# Altium PCB develer_2L_A4.PcbDoc
Units mm, origin at the board's own origin, x right, y up, seen from the top; angles counter-clockwise.
Board outline 200 x 100 mm, 2 copper layers (Top Layer, Bottom Layer), stack 1.57 mm thick; 3 components, 0 nets, 1 pads, 1 vias.
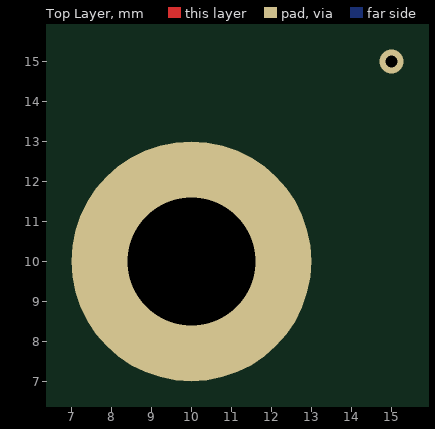
[diagram p0: Top Layer view]
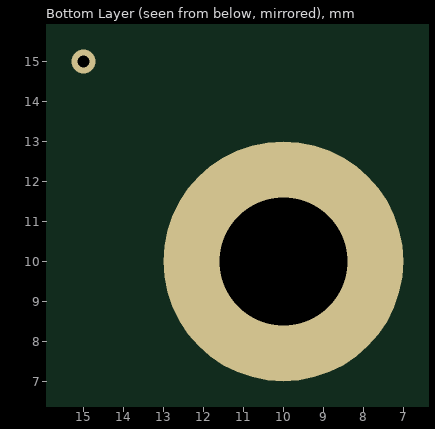
[diagram p1: Bottom Layer view, seen from below]

## Layer stack, top to bottom
Top Solder: solder mask 0.01, Solder Resist, Dk 3.5
Top Layer: signal copper 0.035
Dielectric1: core 1.5, FR-4, Dk 4.2
Bottom Layer: signal copper 0.035
Bottom Solder: solder mask 0.01, Solder Resist, Dk 3.5

## Board outline
0,0 0,100 200,100 200,0

## Design rules (kind name [scope] priority, off if disabled: settings)
Clearance [All] p1: gap=0.25 ignorepadtopadclearanceinfootprint=FALSE
ComponentClearance ComponentClearance_logo [HasFootprint('Develer_logo_30x12mm_PCB_NOTE') vs HasFootprint('Develer_logo_30x12mm_TB_Top')] p1: gap=0 collisioncheckmode=3 verticalgap=0 showdistances=FALSE
ComponentClearance [All] p2: gap=0.25 collisioncheckmode=3 verticalgap=0.25 showdistances=FALSE
DiffPairsRouting [All] p1: maxlimit=0.25 minlimit=0.25 mostfreqgap=0.25 toplayer_minwidth=0.25 toplayer_maxwidth=0.25 toplayer_prefwidth=0.25 bottomlayer_minwidth=0.25 bottomlayer_maxwidth=0.25 bottomlayer_prefwidth=0.25 maxuncoupledlength=12.7
Height [All] p1: minheight=0 maxheight=25 prefheight=12.5
HoleSize [All] p1: absolutevalues=TRUE maxlimit=10 minlimit=0.2 maxpercent=80.000 minpercent=20.000
HoleToHoleClearance [All] p1: gap=0.25 allowstackedmicrovias=TRUE
MinimumSolderMaskSliver [All] p1: minsoldermaskwidth=0.15
PlaneClearance [All] p1: clearance=0.5
PlaneConnect PlaneConnect_via [isvia] p1: planeconnectstyle=Direct reliefexpansion=0.508 reliefentries=4 reliefconductorwidth=0.254 reliefairgap=0.254
PlaneConnect [All] p2: planeconnectstyle=Relief reliefexpansion=0.6 reliefentries=4 reliefconductorwidth=0.6 reliefairgap=0.3
PolygonConnect PolygonConnect_via [isvia] p1: connectstyle=Direct reliefconductorwidth=0.254 reliefentries=4 polygonreliefangle="90 Angle" airgapwidth=0.254
PolygonConnect [All] p2: connectstyle=Relief reliefconductorwidth=0.6 reliefentries=4 polygonreliefangle="90 Angle" airgapwidth=0.6
RoutingCorners [All] p1: cornerstyle=45-Degree minsetback=2.5 maxsetback=2.5
RoutingVias [All] p1: holewidth=0.3 width=0.6 viastyle="Through Hole" minholewidth=0.2 minwidth=0.3 maxholewidth=0.5 maxwidth=1
SilkToSilkClearance [All] p1: silktosilkclearance=0.15
SilkToSolderMaskClearance [IsPad] p1: minsilkscreentomaskgap=0.15 clearancetoexposedcopper=TRUE
SolderMaskExpansion SolderMaskExpansion_via [isVia] p1: expansion=-10
SolderMaskExpansion [All] p2: expansion=0.05
UnRoutedNet [All] p1: checkbadconnections=TRUE
Width [All] p1: maxlimit=5 minlimit=0.15 preferedwidth=0.25
18 further rules are at their usual default settings.

## Components (designator, comment, footprint, x,y, rotation, side; value= is the part's Value field where it differs from the comment)
Designator2 "Comment" Develer_logo_30x12mm_PCB_NOTE 172,-53.75 r0 top
Designator2 "Comment" Develer_logo_30x12mm_TB_Top 172,-53.75 r0 top
Designator3 "Comment" Develer_logo_30x12mm_TB_Top 73,-54.5 r180 bottom

## Footprints (in the part's own frame and the unit in brackets; to place one, negate y for a bottom-side part, rotate by r counter-clockwise, add the part's x,y. Pads: shape width x height; smd on the part's side, far side on the other; paste and mask are expansions set on the pad)
Develer_logo_30x12mm_PCB_NOTE [mm]
Develer_logo_30x12mm_TB_Top [mm]

## Free pads (board coordinates)
  round 6 hole 3.2: Hole(10,10)

## Via types
v1: diameter 0.6, hole 0.3, Top Layer to Bottom Layer, tented both sides, 1 vias

## Nets (pads, with @x,y where several pads share a name; then routed paths per layer and width w, separated by ;. In a path a pad name is that pad's centre, name@x,y a point inside that pad or via, vN(x,y) a via of type N, cw(c..) or ccw(c..) an arc to the next point about the centre after c; other vN are vias at no path point)
copper on no net:
  other v1: 15,15

## Silkscreen, mask and mechanical layers (free items; w line width, h text height)
Outline:
  the board outline again, w0.2
Drawing:
  text "Mechanical Characteristics" at 198.5,-38.5 h5
  text "Mechanical Characteristics" at 198.5,-38.5 h5
Assembly_top:
  text "Assembly TOP" at 198.5,-38.5 h5
Assembly_bot:
  text "Assembly Bottom" at 46.5,-38.25 h5
Note_top:
  text "Note TOP" at 198.5,-38.5 h5
Note_bot:
  text "Note Bottom" at 46.5,-38.25 h5
PCB_Note:
  drawing of 186 lines, arcs and shapes, not listed
  text "Plugged Vias" at 232.25,33.25 h5
  text "File Layer names:" at 230.25,30 h3.5
  text "GTO" at 230.25,26 h3
  text "Top Overlay" at 239.25,26 h3
  text "GTP" at 230.25,23 h3
  text "Top Paste" at 239.25,23 h3
  text "GTS" at 230.25,20 h3
  text "Top Solder" at 239.25,20 h3
  text "GTL" at 230.25,17 h3
  text "Top Layer" at 239.25,17 h3
  text "GBL" at 230.25,14 h3
  text "Bottom Layer" at 239.25,14 h3
  text "GBS" at 230.25,11 h3
  text "Bottom Solder" at 239.25,11 h3
  text "GBP" at 230.25,8 h3
  text "Bottom Paste" at 239.25,8 h3
  text "GBO" at 230.25,5 h3
  text "Bottom Overlay" at 239.25,5 h3
  text "GM1" at 230.25,-1 h3
  text "Outline" at 239.25,-1 h3
  text "GM7" at 230.25,-4 h3
  text "PCB_Note" at 239.25,-4 h3
  text "Layer" at 207.353,-9.546 h1.52
  text "Name" at 213.336,-9.546 h1.52
  text "Material" at 224.911,-9.546 h1.52
  text "Thickness" at 235.073,-9.546 h1.52
  text "Constant" at 243.524,-9.546 h1.52
  text "Board Layer Stack" at 251.443,-9.546 h1.52
  text "1" at 207.353,-12.594 h1.52
  text "Top Overlay" at 213.336,-12.594 h1.52
  text "2" at 207.353,-15.642 h1.52
  text "Top Solder" at 213.336,-15.642 h1.52
  text "Solder Resist" at 224.911,-15.642 h1.52
  text "0.39mil" at 235.073,-15.642 h1.52
  text "3.5" at 243.524,-15.642 h1.52
  text "3" at 207.353,-18.69 h1.52
  text "Top Layer" at 213.336,-18.69 h1.52
  text "Copper" at 224.911,-18.69 h1.52
  text "1.38mil" at 235.073,-18.69 h1.52
  text "4" at 207.353,-21.738 h1.52
  text "Dielectric1" at 213.336,-21.738 h1.52
  text "FR-4" at 224.911,-21.738 h1.52
  text "59.06mil" at 235.073,-21.738 h1.52
  text "4.2" at 243.524,-21.738 h1.52
  text "5" at 207.353,-24.786 h1.52
  text "Bottom Layer" at 213.336,-24.786 h1.52
  text "Copper" at 224.911,-24.786 h1.52
  text "1.38mil" at 235.073,-24.786 h1.52
  text "6" at 207.353,-27.834 h1.52
  text "Bottom Solder" at 213.336,-27.834 h1.52
  text "Solder Resist" at 224.911,-27.834 h1.52
  text "0.39mil" at 235.073,-27.834 h1.52
  text "3.5" at 243.524,-27.834 h1.52
  text "7" at 207.353,-30.882 h1.52
  text "Bottom Overlay" at 213.336,-30.882 h1.52
  text "PCB Note" at 198.5,-38.5 h5
  text "Board Name" at 198.5,-43.05 h3
  text ".prj_name" at 214.5,-43.05 h3
  text "P/N" at 198.5,-46.55 h3
  text ".prj_pn" at 214.5,-46.55 h3
  text "Author" at 198.5,-50.05 h3
  text "AUTHOR" at 214.5,-50.05 h3
  text "Date" at 198.5,-53.65 h3
  text ".prj_date" at 214.5,-53.65 h3
  text "Revision" at 198.5,-57.25 h3
  text ".prj_pcb" at 214.5,-57.25 h3
  text "A4" at 257,-57.25 h3
TitleBlock_top:
  lines w0.3: 171,-58 171,-40.5 197.5,-40.5 ; 197.5,-58 197.5,-46 ; 197.5,-54.5 265,-54.5 ; 197.5,-51 265,-51 ; 197.5,-47.5 265,-47.5 ; 197.5,-46.55 197.5,-44 ; 213.5,-58 213.5,-54.5 213.5,-51 213.5,-47.5 213.5,-44 ; 255,-58 255,-54.5 ; 265,-44 213.5,-44 ; 265,-40.5 213.5,-40.5 ; 265,-33.5 213.5,-33.5 197.5,-33.5 197.5,-37 197.5,-40.5 ; 197.5,-44 197.5,-40.5 ; 197.5,-44 213.5,-44 ; 197.5,-40.5 213.5,-40.5 ; 213.5,-44 213.5,-40.5 ; -25,-63 270,-63 270,147 -25,147 -25,-63 ; -20,-58 265,-58 265,142 -20,142 -20,-58
  text "Board Name" at 198.5,-43.05 h3
  text ".prj_name" at 214.5,-43.05 h3
  text "P/N" at 198.5,-46.55 h3
  text ".prj_pn" at 214.5,-46.55 h3
  text "Author" at 198.5,-50.05 h3
  text "AUTHOR" at 214.5,-50.05 h3
  text "Date" at 198.5,-53.65 h3
  text ".prj_date" at 214.5,-53.65 h3
  text "Revision" at 198.5,-57.25 h3
  text ".prj_pcb" at 214.5,-57.25 h3
  text "A4" at 257,-57.25 h3
TitleBlock_bot:
  lines w0.3: -25,-63 -25,147 270,147 ; -20,-58 -20,142 265,142 ; -20,-54.5 47.5,-54.5 ; -20,-51 47.5,-51 ; -20,-47.5 47.5,-47.5 ; -20,-44 31.5,-44 ; -20,-40.5 31.5,-40.5 ; -20,-33.5 31.5,-33.5 47.5,-33.5 47.5,-37 47.5,-40.5 ; -10,-58 -10,-54.5 ; 31.5,-58 31.5,-54.5 31.5,-51 31.5,-47.5 31.5,-44 ; 47.5,-58 47.5,-46 ; 47.5,-46.55 47.5,-44 ; 74,-58 74,-40.5 47.5,-40.5 ; 31.5,-44 31.5,-40.5 ; 31.5,-44 47.5,-44 ; 31.5,-40.5 47.5,-40.5 ; 47.5,-44 47.5,-40.5
  text ".prj_name" at 30.5,-43.05 h3
  text "Board Name" at 46.5,-43.05 h3
  text ".prj_pn" at 30.5,-46.55 h3
  text "P/N" at 46.5,-46.55 h3
  text "AUTHOR" at 30.5,-50.05 h3
  text "Author" at 46.5,-50.05 h3
  text ".prj_date" at 30.5,-53.65 h3
  text "Date" at 46.5,-53.65 h3
  text "A4" at -12,-57.25 h3
  text ".prj_pcb" at 30.5,-57.25 h3
  text "Revision" at 46.5,-57.25 h3

## Text inside footprints (layer, text, board x,y; h text height)
Designator2: PCB_Note "develer" at 172.48,-53.75 h7.04
Designator2: TitleBlock_top "develer" at 172.48,-53.75 h7.04
Designator3: TitleBlock_bot "develer" at 72.52,-54.5 h7.04